# Altium PCB SDC.PcbDoc (part 2 of 2)
Units mm, origin at the board's own origin, x right, y up, seen from the top; angles counter-clockwise.
Board outline 130 x 100 mm, 4 copper layers (Top Layer, Ground Plane, Power Plane, Bottom Layer), stack 1.666 mm thick; 140 components, 375 nets, 501 pads, 368 vias.
Unrouted connection lines stored in the file: 16.
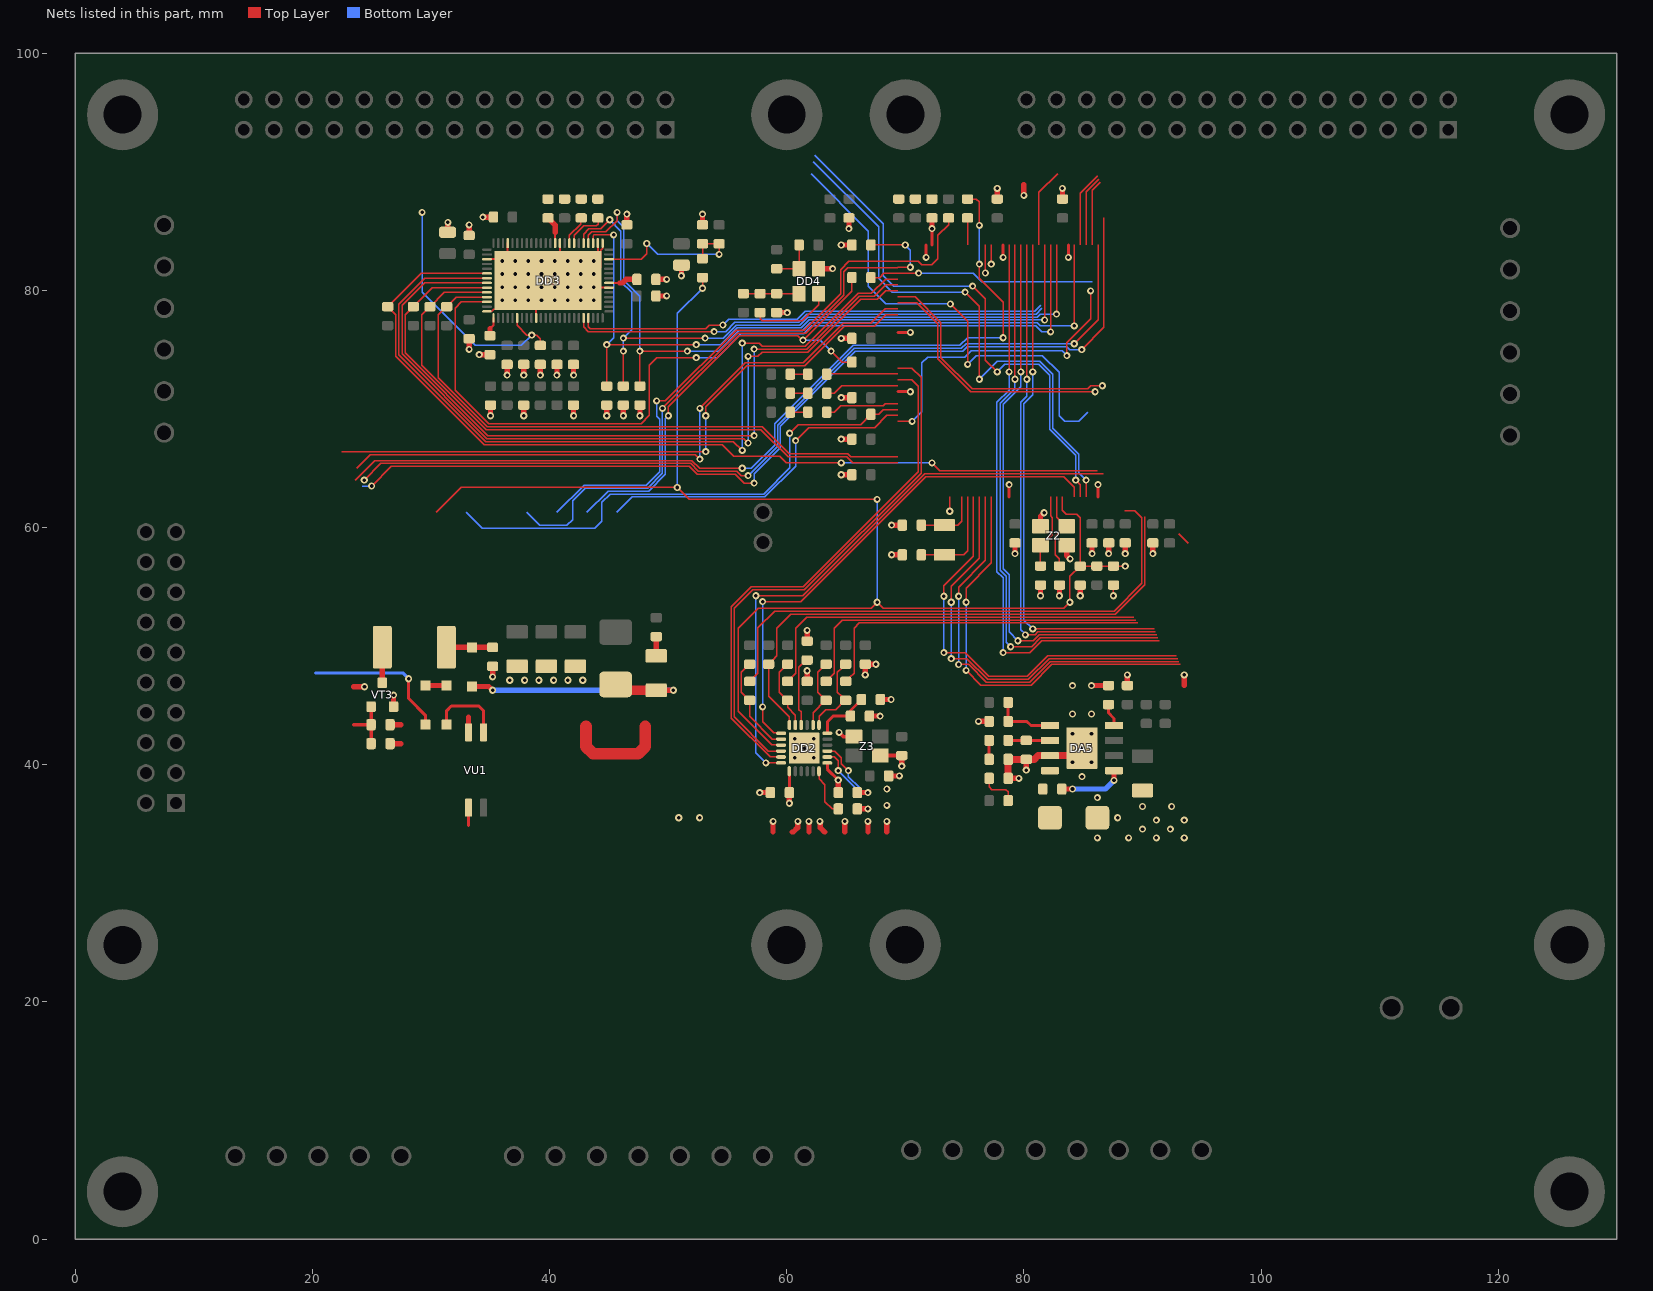
[diagram p4: the nets of this part, all layers, seen from the top]

## Via types
v1: diameter 0.6, hole 0.3, Top Layer to Bottom Layer, tented both sides, 367 vias
v2: diameter 0.6, hole 0.3, Top Layer to Bottom Layer, 1 vias

## Nets (pads, with @x,y where several pads share a name; then routed paths per layer and width w, separated by ;. In a path a pad name is that pad's centre, name@x,y a point inside that pad or via, vN(x,y) a via of type N, cw(c..) or ccw(c..) an arc to the next point about the centre after c; other vN are vias at no path point) (continued)
GND: C1.1 C4.1 C5.2 C6.2 C7.2 C8.2 C9.1 C10.1 C15.1 C16.1 C17.1 C18.1 C19.1 C20.1 C21.1 C22.1 C23.1 C24.1 C25.1 C26.1 C28.1 C29.1 C30.1 C34.2 C35.2 C36.1 C37.1 C38.1 C39.1 C40.1 C41.1 C42.1 C43.1 C44.1 C45.1 C46.1 C47.1 C48.1 C49.1 C50.1 C51.2 C52.1 C53.1 C54.1 C146.1 C148.1 C149.1 C154.1 C162.1 C163.1 C164.1 C167.2 C175.1 DA5.7 DA5.9 DD2.25 DD3.3 DD3.14 DD3.24 DD3.44 DD3.53 DD3.54 DD3.62 DD3.73 DD3.77 DD4.2 R8.2 R12.2 R28.1 R29.1 R35.2 R36.2 R41.1 R45.2 R50.2 R52.2 R53.1 R54.2 R129.1 R141.2 R145.2 R168.2 VD54.2 VT3.2 VU1.2 Z2.2 Z3.2 | length 100.2
  Top Layer w0.125: DD3.14@34.725,78.225 35.143,78.225 35.318,78.4 36.35,78.4 v1(37.125,79.175) ; v1(43.725,81.375) 44.3,81.95 44.3,83.382 44.475,83.557 DD3.53@44.475,83.975
  Top Layer w0.17: DD3.3@34.725,82.625 DD3.77@36.475,82.625 ; DD3.73@36.475,83.975 DD3.77@36.475,82.625 ; v1(37.125,81.375) 36.475,82.025 DD3.77@36.475,82.625 ; v1(38.225,82.475) 38.075,82.625 DD3.77@36.475,82.625 ; DD3.24@38.875,77.675 38.875,78.725 v1(39.325,79.175) ; v1(40.425,82.475) 40.875,82.925 DD3.62@40.875,83.975 ; v1(42.625,79.175) 43.675,80.225 DD3.44@45.025,80.225 ; v1(43.725,82.475) 44.075,82.825 DD3.54@44.075,83.975
  Top Layer w0.25: 69.375,71.45 v1(70.425,71.45) ; 69.375,76.45 v1(70.425,76.45) ; v1(71.75,82.775) 71.75,83.825 ; v1(78.25,82.775) 78.25,83.825 ; 78.75,62.575 v1(78.75,63.625) ; v1(83.75,82.775) 83.75,83.825 ; 86.25,62.575 v1(86.25,63.625)
  Top Layer w0.3: v1(64.425,42.725) 64.775,42.375 Z3.2@65.675,42.375 ; Z3.2@67.875,40.775 C34.2@69.7,40.775
  Top Layer w0.45: 23.5,46.575 v1(24.4,46.575) ; C175.1@26.55,41.775 27.45,41.775 ; R168.2@26.55,43.375 27.45,43.375 ; VT3.2@26.85,44.9 v1(26.85,45.875) ; C49.1@31.425,84.825 v1(31.425,85.725) ; VU1.2@33.165,42.725 33.175,42.735 33.175,44 ; v1(33.225,75.025) C41.1@33.225,75.925 ; C40.1@33.225,84.625 v1(33.225,85.525) ; v1(34.075,74.575) C46.1@34.975,74.575 ; v1(34.375,86.175) C45.1@35.275,86.175 ; v1(35.025,69.425) R41.1@35.025,70.325 ; v1(35.2,47.4) C167.2@35.2,48.3 ; v1(36.425,72.85) C52.1@36.425,73.75 ; v1(37.825,69.425) R53.1@37.825,70.325 ; v1(37.825,72.85) C54.1@37.825,73.75 ; v1(39.225,72.85) C37.1@39.225,73.75 ; v1(40.625,72.85) C38.1@40.625,73.75 ; v1(42.025,69.425) C53.1@42.025,70.325 ; v1(42.025,72.85) C39.1@42.025,73.75 ; v1(44.825,69.425) R50.2@44.825,70.325 ; v1(46.225,69.425) R52.2@46.225,70.325 ; C43.1@46.525,85.525 v1(46.525,86.425) ; v1(47.625,69.425) R54.2@47.625,70.325 ; C42.1@48.975,79.525 v1(49.875,79.525) ; C47.1@48.975,80.925 v1(49.875,80.925) ; v1(51.125,81.225) C50.1@51.125,82.125 ; C36.1@52.9,85.525 v1(52.9,86.425) ; v1(57.725,37.65) C25.1@58.625,37.65 ; C51.2@59.15,78.125 v1(60.05,78.125) ; C28.1@61.725,47.025 v1(61.725,47.925) ; R29.1@61.725,50.425 v1(61.725,51.325) ; 61.875,34.325 v1(61.875,35.225) ; DD4.2@62.7,81.825 v1(63.875,81.825) ; v1(64.6,64.45) C20.1@65.5,64.45 ; v1(64.6,67.45) R12.2@65.5,67.45 ; v1(64.6,70.95) C19.1@65.5,70.95 ; v1(64.6,75.95) C18.1@65.5,75.95 ; v1(64.6,83.825) R8.2@65.5,83.825 ; v1(65.25,85.2) R45.2@65.25,86.1 ; R28.1@65.95,36.275 v1(66.85,36.275) ; C26.1@65.95,37.65 v1(66.85,37.65) ; C29.1@66.975,44.1 v1(67.875,44.1) ; C30.1@67.9,45.5 v1(68.8,45.5) ; C35.2@68.6,39.05 v1(69.5,39.05) ; v1(68.85,57.7) C8.2@69.75,57.7 ; v1(68.85,60.2) C6.2@69.75,60.2 ; v1(69.7,39.875) C34.2@69.7,40.775 ; v1(76.175,43.65) R141.2@77.075,43.65 ; C16.1@77.75,87.7 v1(77.75,88.6) ; R129.1@78.675,38.85 v1(79.575,38.85) ; v1(79.25,57.8) C9.1@79.25,58.7 ; v1(80,88) 80,88.9 ; v1(80.2,39.55) C149.1@80.2,40.45 ; v1(81.4,54.25) C5.2@81.4,55.15 ; Z2.2@81.4,60.1 81.4,60.95 v1(81.7,61.25) ; v1(83,54.25) C7.2@83,55.15 ; C15.1@83.25,87.7 v1(83.25,88.6) ; Z2.2@83.6,58.5 83.6,57.65 v1(83.9,57.35) ; v1(84.75,54.25) C1.1@84.75,55.15 ; v1(85.7,46.675) C154.1@87.125,46.675 ; v1(85.75,57.8) C10.1@85.75,58.7 ; v1(87.15,57.8) C22.1@87.15,58.7 ; v1(88.55,57.8) C23.1@88.55,58.7 ; R145.2@88.725,46.675 v1(88.725,47.575) ; v1(90.875,57.8) C24.1@90.875,58.7 ; 93.525,46.675 v1(93.525,47.575)
  Top Layer w0.6: R129.1@78.675,38.85 C148.1@78.675,40.45 C149.1@80.2,40.45 80.875,40.45 81.19,40.765 DA5.7@82.2,40.765 84.265,40.765 v1(84.9,41.4)
  other v1: 86.2,33.825 88.825,33.825 91.175,33.825 93.525,33.825 90,34.575 92.35,34.575 91.175,35.325 93.525,35.325 87.9,35.525 90,36.475 92.45,36.475 86.2,37.225 84.9,39 84.1,40.2 85.7,40.2 60.675,40.6 62.275,40.6 61.475,41.4 60.675,42.2 62.275,42.2 84.1,42.6 85.7,42.6 84.1,44.275 85.7,44.275 84.1,46.675 36.65,47.125 37.9,47.125 39.1,47.125 40.35,47.125 41.55,47.125 42.8,47.125 36.025,79.175 38.225,79.175 40.425,79.175 41.525,79.175 43.725,79.175 36.025,80.275 37.125,80.275 38.225,80.275 39.325,80.275 40.425,80.275 41.525,80.275 42.625,80.275 43.725,80.275 36.025,81.375 38.225,81.375 39.325,81.375 40.425,81.375 41.525,81.375 42.625,81.375 36.025,82.475 37.125,82.475 39.325,82.475 41.525,82.475 42.625,82.475
GND_IF1: 
GND_IF2: 
GNDP: VU1.3 | length 1.5
  Top Layer w0.25: VU1.3@33.165,36.375 33.175,36.365 33.175,34.875
  other v1: 50.9,35.525 52.65,35.525
GPS_ANT: 
GPS_EINT0:  | length 53.9
  Top Layer w0.125: 22.5,66.4 v1(53.175,66.4) ; v1(53.175,69.425) 53.175,70.175 56.625,73.625 61.504,73.625 64.854,76.975 67.375,76.975 68.35,77.95 69.375,77.95
  Bottom Layer w0.125: v1(53.175,66.4) v1(53.175,69.425)
GPS_GPIO:  | length 54
  Top Layer w0.125: 23.75,65 24.9,66.15 52.3,66.15 v1(52.675,65.775) ; v1(52.675,70.05) 56.5,73.875 61.4,73.875 64.75,77.225 67.1,77.225 68.325,78.45 69.375,78.45
  Bottom Layer w0.125: v1(52.675,65.775) v1(52.675,70.05)
GPS_RX:  | length 75.7
  Top Layer w0.125: v1(24.375,64) 25.775,65.4 51.896,65.4 52.546,64.75 55.8,64.75 56.175,64.375 v1(56.75,64.375) ; v1(84.25,75.5) 86.25,77.5 86.25,83.825
  Bottom Layer w0.125: v1(56.75,64.375) 59.225,66.85 59.225,68.629 65.696,75.1 74.725,75.1 75.125,75.5 v1(84.25,75.5)
GPS_TX:  | length 80.1
  Top Layer w0.125: v1(25,63.5) 26.65,65.15 51.793,65.15 52.443,64.5 55.675,64.5 56.425,63.75 v1(57.25,63.75) ; v1(84.875,75) 86.75,76.875 86.75,83.825 86.75,86.1
  Bottom Layer w0.125: 24.229,63.5 v1(25,63.5) ; v1(57.25,63.75) 57.25,64.521 59.475,66.746 59.475,68.525 65.8,74.85 74.829,74.85 75.229,75.25 83.625,75.25 83.875,75 v1(84.875,75)
HSE_IN: C5.1 Z2.1 | length 6.4
  Top Layer w0.125: C5.1@81.4,56.75 Z2.1@81.4,58.5 81.5,58.5 82.4,59.4 82.4,60.825 82.25,60.975 82.25,62.575
HSE_OUT: C7.1 Z2.3 | length 6.7
  Top Layer w0.125: 82.75,62.575 82.75,60.85 Z2.3@83.5,60.1 ; C7.1@83,56.75 83,57.35 82.65,57.7 82.65,59.25 Z2.3@83.5,60.1 ; Z2.3@83.6,60.1 Z2.3@83.5,60.1
INC_ENC_1_A: DD3.35 | length 39.8
  Top Layer w0.125: DD3.35@43.275,77.675 43.275,76.925 43.425,76.775 53.175,76.775 53.475,77.075 v1(54.625,77.075)
  Bottom Layer w0.125: v1(54.625,77.075) 55.125,77.575 60.9,77.575 61.575,78.25 80.918,78.25 81.418,78.75
INC_ENC_1_A_N: 
INC_ENC_1_A_P: 
INC_ENC_1_B: DD3.34 | length 40.4
  Top Layer w0.125: DD3.34@42.875,77.675 42.875,76.925 43.275,76.525 v1(53.875,76.525)
  Bottom Layer w0.125: v1(53.875,76.525) 54.839,76.525 55.639,77.325 61.004,77.325 61.679,78 81.021,78 81.521,78.5
INC_ENC_1_B_N: 
INC_ENC_1_B_P: 
INC_ENC_2_A: 
INC_ENC_2_A_N: 
INC_ENC_2_A_P: 
INC_ENC_2_B: 
INC_ENC_2_B_N: 
INC_ENC_2_B_P: 
ISO_OUT_1:  | length 35.3
  Top Layer w0.125: v1(73.25,49.45) 75.054,49.45 77.041,47.462 80.28,47.462 82.018,49.2 82.036,49.2 92.862,49.2 ; v1(73.25,54.2) 73.25,55.075 75.75,57.575 75.75,62.575
  Bottom Layer w0.125: v1(73.25,49.45) v1(73.25,54.2)
ISO_OUT_2:  | length 35.1
  Top Layer w0.125: v1(73.875,48.95) 75.2,48.95 76.938,47.212 80.384,47.212 82.121,48.95 82.139,48.95 92.966,48.95 ; v1(73.875,53.7) 73.875,55.05 76.25,57.425 76.25,62.575
  Bottom Layer w0.125: v1(73.875,48.95) v1(73.875,53.7)
ISO_OUT_3:  | length 35
  Top Layer w0.125: v1(74.5,48.45) 75.346,48.45 76.834,46.962 80.505,46.962 82.243,48.7 93.07,48.7 ; v1(74.5,54.2) 74.5,54.975 76.75,57.225 76.75,62.575
  Bottom Layer w0.125: v1(74.5,48.45) v1(74.5,54.2)
ISO_OUT_4:  | length 34.8
  Top Layer w0.125: v1(75.125,47.95) 76.363,46.712 80.609,46.712 82.346,48.45 93.173,48.45 ; v1(75.125,53.7) 75.125,54.9 77.25,57.025 77.25,62.575
  Bottom Layer w0.125: v1(75.125,47.95) v1(75.125,53.7)
LED1: HL1.2 | length 6
  Top Layer w0.125: HL1.2@63.375,72.925 63.4,72.95 69.375,72.95
LED2: HL2.2 | length 6.3
  Top Layer w0.125: HL2.2@63.375,71.325 64.025,71.325 64.65,71.95 69.375,71.95
LED3: HL3.2 | length 6.3
  Top Layer w0.125: HL3.2@63.375,69.725 64.025,69.725 64.575,70.275 68.125,70.275 68.3,70.45 69.375,70.45
LED_G: DD2.2 | length 4.1
  Top Layer w0.125: DD2.2@63.425,40.65 64.025,40.65 64.35,40.325 v1(64.35,39.5)
  Bottom Layer w0.125: v1(64.35,39.5) 65.9,37.95
LED_Y: DD2.3 | length 4.6
  Top Layer w0.125: DD2.3@63.425,41.15 64.05,41.15 64.6,40.6 64.6,40.1 v1(65.2,39.5)
  Bottom Layer w0.125: v1(65.2,39.5) 65.2,39.004 66.15,38.054
LSE_IN: C6.1 Z1.2 | length 5.6
  Top Layer w0.125: C6.1@71.35,60.2 Z1.2@73.3,60.2 74.425,60.2 74.75,60.525 74.75,62.575
LSE_OUT: C8.1 Z1.1 | length 8.6
  Top Layer w0.125: C8.1@71.35,57.7 Z1.1@73.3,57.7 74.925,57.7 75.25,58.025 75.25,62.575
MDC: DD2.13 | length 43.9
  Top Layer w0.125: v1(57.975,44.875) 57.975,43.624 58.916,42.683 59.492,42.683 DD2.13@59.525,42.65 ; v1(57.975,53.75) 61.2,53.75 71.725,64.275 83.35,64.275 83.95,63.675 84.25,63.375 84.25,62.575
  Bottom Layer w0.125: v1(57.975,44.875) v1(57.975,53.75)
MDIO: DD2.12 R20.2 | length 47.5
  Top Layer w0.125: DD2.12@60.225,43.35 60.225,44.025 58.475,45.775 R20.2@58.475,48.475 58.497,48.475 58.827,48.805 58.827,48.827 59.175,49.175 59.175,51.525 60.35,52.7 64.493,52.7 65.789,52.7 85.95,52.7 87.129,52.7 87.704,52.7 90.187,55.184 90.187,55.759 90.187,56.937 90.187,60.916
NetC2_2:  | length 1.2
  Top Layer w0.125: v1(73.75,61.375) 73.75,62.575
NetC3_2: C4.2 | length 2.3
  Top Layer w0.25: 72.25,83.825 v1(72.25,85.2)
  Top Layer w0.45: v1(72.25,85.2) C4.2@72.25,86.1
NetC25_2: C25.2 C26.2 DD2.1 DD2.19 L2.2 | length 13.1
  Top Layer w0.25: C25.2@60.225,37.65 DD2.19@60.225,39.45 ; DD2.1@63.425,40.15 63.425,39.625 v1(64.35,38.7)
  Top Layer w0.45: 58.85,34.325 v1(58.85,35.225) ; v1(60.225,36.75) C25.2@60.225,37.65 ; 60.475,34.325 60.55,34.325 60.921,34.696 60.921,35.196 v1(60.95,35.225) ; v1@62.829,35.196 62.829,34.696 63.2,34.325 ; C26.2@64.35,37.65 v1(64.35,38.7) ; 64.9,34.325 v1(64.9,35.225) ; v1(66.625,47.575) L2.2@66.625,48.475 v1(67.525,48.475) ; 66.85,34.325 v1(66.85,35.225) ; 68.45,34.325 v1(68.45,35.225)
  other v1: 62.8,35.225 68.45,36.575 68.45,37.95
NetC29_2: C29.2 C30.2 DD2.6 | length 4.9
  Top Layer w0.25: DD2.6@63.425,42.65 63.425,43.6 63.925,44.1 C29.2@65.375,44.1 65.375,44.575 C30.2@66.3,45.5
NetC36_2: C36.2 DD3.50 R37.1 R38.1 | length 14.3
  Top Layer w0.125: DD3.50@45.025,82.625 47.725,82.625 48.2,83.1 v1(48.2,83.95) ; R38.1@52.9,82.675 C36.2@52.9,83.925 R37.1@54.3,83.925 v1(54.3,83.025)
  Bottom Layer w0.125: v1(48.2,83.95) 49.125,83.025 v1(54.3,83.025)
NetC46_2: C46.2 DD3.15 | length 1.6
  Top Layer w0.17: 34.975,76.75 35.275,77.05 DD3.15@35.275,77.675
  Top Layer w0.45: C46.2@34.975,76.175 34.975,76.75
NetC47_2: C47.2 DD3.45 | length 2.5
  Top Layer w0.17: DD3.45@45.025,80.625 45.925,80.625
  Top Layer w0.45: 45.925,80.625 46.15,80.625 46.45,80.925 C47.2@47.375,80.925
NetC48_2: C48.2 DD3.63 | length 2.4
  Top Layer w0.17: C48.2@39.875,86.1 C48.2@39.95,86.1 ; DD3.63@40.475,83.975 40.475,84.875
  Top Layer w0.45: C48.2@39.875,86.1 40.475,85.5 40.475,84.875
NetC51_1: C51.1 DD4.4 L3.1 R40.1 | length 4.7
  Top Layer w0.125: L3.1@56.35,79.725 R40.1@57.75,79.725 C51.1@59.15,79.725 DD4.4@61.05,79.725
NetC55_2: 
NetC65_2: 
NetC66_2: 
NetC67_2: 
NetC98_2: 
NetC106_2: 
NetC116_2: 
NetC118_1: 
NetC119_2: 
NetC122_2: 
NetC124_1: 
NetC124_2: 
NetC126_2: 
NetC131_1: 
NetC131_2: 
NetC132_1: 
NetC132_2: 
NetC135_2: 
NetC136_2: 
NetC142_2: 
NetC143_2: 
NetC144_1: C144.1 DA5.8 VD54.1
NetC144_2: C144.2 DA5.1 | length 5.5
  Top Layer w0.45: C144.2@83.2,37.95 v1(84.1,37.95) ; v1(87.6,38.675) DA5.1@87.6,39.495
  Bottom Layer w0.45: v1(84.1,37.95) 86.875,37.95 v1(87.6,38.675)
NetC148_2: C148.2 R138.2 | length 1.6
  Top Layer w0.25: C148.2@77.075,40.45 R138.2@77.075,42.05
NetC149_2: C149.2 DA5.6 R138.1 | length 3.5
  Top Layer w0.25: R138.1@78.675,42.05 C149.2@80.2,42.05 80.207,42.043 82.192,42.043 DA5.6@82.2,42.035
NetC154_2: C154.2 DA5.4 | length 2
  Top Layer w0.25: C154.2@87.125,45.075 87.125,44.375 87.6,43.9 DA5.4@87.6,43.305
NetC155_1: 
NetC156_1: 
NetC165_1: C165.1 R156.1 | length 1.6
  Top Layer w0.45: R156.1@49,49.175 C165.1@49,50.8
NetC167_1: C167.1 R162.2 VD58.1 | length 3.9
  Top Layer w0.45: R162.2@31.3,49.9 VD58.1@33.475,49.9 C167.1@35.2,49.9
NetC169_2: 
NetC172_2: 
NetC173_1: 
NetC174_1: 
NetC175_2: C175.2 R168.1 VT3.1 | length 4.6
  Top Layer w0.3: 23.5,43.375 R168.1@24.95,43.375 ; C175.2@24.95,41.775 R168.1@24.95,43.375 ; VT3.1@24.95,44.9 R168.1@24.95,43.375
NetC177_2: 
NetC178_1: 
NetC178_2: 
NetDA2_10: 
NetDA2_12: 
NetDA2_19: 
NetDA3_5: 
NetDA4_3: 
NetDA4_5: 
NetDA4_8: 
NetDA4_10: 
NetDA5_5: DA5.5 R139.2 R141.1 | length 5.3
  Top Layer w0.25: R139.2@78.675,45.25 R141.1@78.675,43.65 80.25,43.65 80.595,43.305 DA5.5@82.2,43.305
NetDA6_4: 
NetDA6_5: 
NetDA6_10: 
NetDA6_15: 
NetDA6_16: 
NetDA6_20: 
NetDD2_7: DD2.7 R18.2 R26.1 | length 7.2
  Top Layer w0.125: DD2.7@62.725,43.35 62.725,44.075 63.3,44.65 64.125,44.65 64.9,45.425 R26.1@64.953,45.425 ; R26.1@64.975,45.425 R26.1@64.953,45.425 ; R18.2@64.975,48.475 64.953,48.475 64.623,48.145 64.623,48.123 64.275,47.775 64.275,46.125 64.623,45.777 64.623,45.755 R26.1@64.953,45.425
NetDD2_8: DD2.8 R17.2 R25.1 | length 6.2
  Top Layer w0.125: DD2.8@62.225,43.35 62.225,44.4 63.25,45.425 R25.1@63.303,45.425 ; R25.1@63.325,45.425 R25.1@63.303,45.425 ; R17.2@63.325,48.475 63.303,48.475 62.973,48.145 62.973,48.123 62.625,47.775 62.625,46.125 62.973,45.777 62.973,45.755 R25.1@63.303,45.425
NetDD2_10: DD2.10 R29.2 | length 5.9
  Top Layer w0.125: DD2.10@61.225,43.35 61.225,44.45 61.025,44.65 61.025,48.2 61.65,48.825 R29.2@61.725,48.825
NetDD2_11: DD2.11 R19.2 R27.1 | length 6.1
  Top Layer w0.125: R27.1@60,45.425 R27.1@60.053,45.425 ; R19.2@60.075,48.475 60.053,48.475 59.723,48.145 59.723,48.123 59.375,47.775 59.375,46.125 59.723,45.777 59.723,45.755 R27.1@60.053,45.425 ; DD2.11@60.725,43.35 60.725,44.175 60.075,44.825 R27.1@60.075,45.425 R27.1@60.053,45.425
NetDD2_14: DD2.14 R33.1 R34.2 | length 8.4
  Top Layer w0.125: R33.1@56.853,45.425 56.523,45.755 56.523,45.777 56.175,46.125 56.175,47.775 56.523,48.123 56.523,48.145 56.853,48.475 R34.2@56.875,48.475 ; R33.1@56.875,45.425 56.875,44.075 58.8,42.15 DD2.14@59.525,42.15
NetDD2_24: DD2.24 R28.2 | length 4.2
  Top Layer w0.125: DD2.24@62.725,39.45 62.725,38.825 63.225,38.325 63.225,36.875 63.825,36.275 R28.2@64.35,36.275
NetDD3_59: DD3.59 R35.1 | length 3.6
  Top Layer w0.125: DD3.59@42.075,83.975 42.075,84.625 42.875,85.425 43.95,85.425 44.1,85.575 44.1,86.075 R35.1@44.075,86.1
NetDD3_60: DD3.60 R36.1 | length 2.5
  Top Layer w0.125: DD3.60@41.675,83.975 41.675,84.625 42.636,85.586 42.636,86.061 R36.1@42.675,86.1
NetDD4_1: DD4.1 R40.2 | length 7
  Top Layer w0.125: R40.2@57.75,78.125 57.75,77.6 57.925,77.425 61.325,77.425 62.7,78.8 DD4.1@62.7,79.725
NetDD4_3: DD4.3 R44.2 R47.2 | length 3.9
  Top Layer w0.125: R47.2@59.15,81.825 DD4.3@61.05,81.825 R44.2@61.05,83.825
NetDD5_59: 
NetDD5_60: 
NetDD6_2: 
NetDD6_6: 
NetDD6_7: 
NetDD7_7: 
NetDD7_8: 
NetDD8_2: 
NetDD8_6: 
NetDD8_7: 
NetDD9_1: 
NetDD9_3: 
NetDD9_4: 
NetDD9_6: 
NetDD10_7: 
NetDD10_8: 
NetDD11_2: 
NetDD11_7: 
NetDD11_8: 
NetDD12_1: 
NetDD12_4: 
NetDD12_6: 
NetDD13_7: 
NetDD13_8: 
NetDD14_2: 
NetDD14_7: 
NetDD14_8: 
NetDD15_1: 
NetDD15_4: 
NetDD15_6: 
NetDD16_7: 
NetDD16_8: 
NetDD17_11: 
NetDD17_12: 
NetDD17_13: 
NetDD17_14: 
NetDD18_11: 
NetDD18_12: 
NetDD18_13: 
NetDD18_14: 
NetDD19_6: 
NetDD19_7: 
NetFU1_2: 
NetFU2_2: 
NetFU3_2: 
NetFU4_2: 
NetFU5_2: 
NetHL1_1: HL1.1 R1.2 | length 1.5
  Top Layer w0.125: R1.2@60.3,72.925 HL1.1@61.775,72.925
NetHL2_1: HL2.1 R2.2 | length 1.5
  Top Layer w0.125: R2.2@60.3,71.325 HL2.1@61.775,71.325
NetHL3_1: HL3.1 R3.2 | length 1.5
  Top Layer w0.125: R3.2@60.3,69.725 HL3.1@61.775,69.725
NetHL4_1: HL4.1 R129.2 | length 3.2
  Top Layer w0.125: R129.2@77.075,38.85 77.075,38.125 77.3,37.9 78.475,37.9 78.675,37.7 HL4.1@78.675,36.975
NetHL5_1: 
NetL7_2: 
NetMH1_1: 
NetMH3_1: 
NetMH4_1: 
NetMH5_1: 
NetR30_2: 
NetR32_2: 
NetR107_1: 
NetR114_1: 
NetR155_2: 
NetR156_2: R156.2 VD57.2 VD58.2 | length 22.2
  Top Layer w0.45: VD58.2@33.475,46.6 34.875,46.6 v1(35.2,46.275) ; VD57.2@45.575,46.765 VD57.2@46.065,46.275 ; R156.2@49,46.275 v1(50.45,46.275)
  Top Layer w0.8: VD57.2@46.065,46.275 R156.2@49,46.275
  Bottom Layer w0.45: v1(35.2,46.275) v1(50.45,46.275)
NetR162_1: R162.1 VT3.3 | length 3
  Top Layer w0.45: VT3.3@25.9,46.9 R162.1@25.9,49.9
NetR173_1: VD63.1 | length 12.5
  Top Layer w0.25: v1(28.125,47.25) 28.125,45.575 29.525,44.175 VD63.1@29.525,43.375
  Bottom Layer w0.25: 20.25,47.75 27.625,47.75 v1(28.125,47.25)
NetTV1_8:  | length 8.9
  Top Layer w1: 43.075,43.225 43.075,41.525 43.675,40.925 47.475,40.925 48.075,41.525 48.075,43.225
NetVD51_2: 
NetVD63_2: VD63.2 VD65.1 | length 1.8
  Top Layer w0.45: VD63.2@29.525,46.675 VD65.1@31.325,46.675
NetVD65_2: VD65.2 VU1.1 | length 6.4
  Top Layer w0.25: VD65.2@31.325,43.375 31.325,44.555 31.72,44.95 34.04,44.95 34.435,44.555 VU1.1@34.435,42.725
OUT_1: 
OUT_1_cn: 
OUT_2: 
OUT_2_cn: 
OUT_3: 
OUT_3_cn: 
OUT_4: 
OUT_4_cn: 
OUT_FLG_0: 
OUT_FLG_0_CN: 
OUT_FLG_1: 
OUT_FLG_1_CN: 
OUT_FLG_2:  | length 43.2
  Top Layer w0.125: v1(80.75,51.45) 90.991,51.45 ; v1(80.75,73.125) 80.75,83.825
  Bottom Layer w0.125: v1(80.75,51.45) 80,52.2 80,70.425 80.75,71.175 v1(80.75,73.125)
OUT_FLG_2_CN: 
OUT_FLG_3:  | length 44.3
  Top Layer w0.125: v1(80.125,50.95) 80.939,50.95 81.189,51.2 81.207,51.2 91.094,51.2 ; v1(80.25,72.5) 80.25,83.825
  Bottom Layer w0.125: v1(80.125,50.95) 80.125,51.025 79.75,51.4 79.75,70.55 80.25,71.05 v1(80.25,72.5)
OUT_FLG_3_CN: 
OUT_FLG_4:  | length 46.4
  Top Layer w0.125: v1(79.5,50.45) 80.793,50.45 81.293,50.95 81.311,50.95 91.198,50.95 ; v1(79.75,73.125) 79.75,83.825
  Bottom Layer w0.125: v1(79.5,50.45) 78.75,51.2 78.75,56.025 78.262,56.513 78.262,70.38 79.75,71.868 v1(79.75,73.125)
OUT_FLG_4_CN: 
OUT_FLG_5:  | length 47.5
  Top Layer w0.125: v1(78.875,49.95) 80.647,49.95 81.397,50.7 81.414,50.7 91.302,50.7 ; v1(79.25,72.5) 79.25,83.825
  Bottom Layer w0.125: v1(78.875,49.95) 78.5,50.325 78.5,55.9 78.012,56.388 78.012,70.484 79.25,71.721 v1(79.25,72.5)
OUT_FLG_5_CN: 
OUT_FLG_6:  | length 48.6
  Top Layer w0.125: v1(78.25,49.45) 80.5,49.45 81.5,50.45 81.518,50.45 91.405,50.45 ; v1(78.75,73.125) 78.75,83.825
  Bottom Layer w0.125: v1(78.25,49.45) 78.25,55.75 77.725,56.275 77.725,70.55 78.75,71.575 v1(78.75,73.125)
OUT_FLG_6_CN: 
PGD_3.3V: R131.1 | length 0.9
  Top Layer w0.125: v1(87.55,54.25) R131.1@87.55,55.15
POE_V1+: 
POE_V1-: 
POE_V2+: 
POE_V2-: 
POE_VCC: 
POE_VDD: 
POE_VPD: 
POE_VSS: 
RMII_CRS_DV: R27.2 | length 33.7
  Top Layer w0.125: R27.2@60.075,47.025 60.097,47.025 60.427,47.355 60.427,47.377 60.775,47.725 60.775,51.525 61.7,52.45 64.596,52.45 65.893,52.45 88.764,52.45 89.275,52.45
RMII_REFCLK: R33.2 | length 45.9
  Top Layer w0.125: R33.2@56.875,47.025 56.897,47.025 57.227,47.355 57.227,47.377 57.575,47.725 57.575,51.55 58.975,52.95 64.389,52.95 65.686,52.95 87.6,52.95 89.937,55.287 89.937,60.813 89.352,61.398 88.502,61.398
RMII_RXD0: R25.2 | length 30.5
  Top Layer w0.125: R25.2@63.325,47.025 63.347,47.025 63.677,47.355 63.677,47.377 64.025,47.725 64.025,51.525 64.7,52.2 65.996,52.2 88.868,52.2 89.425,52.2
RMII_RXD1: R26.2 | length 28.9
  Top Layer w0.125: R26.2@64.975,47.025 64.997,47.025 65.327,47.355 65.327,47.377 65.675,47.725 65.675,51.525 66.1,51.95 88.971,51.95 89.6,51.95
RMII_TXD0: DD2.17 | length 44.5
  Top Layer w0.125: DD2.17@59.525,40.65 58.596,40.65 55.325,43.921 55.325,53.3 57.025,55 61.375,55 71.075,64.7 71.075,71.9 70.525,72.45 69.375,72.45
RMII_TXD1: DD2.18 | length 49.3
  Top Layer w0.125: v1(57.4,54.25) 61.346,54.25 71.621,64.525 86.675,64.525 ; v1(58.25,40.15) DD2.18@59.525,40.15
  Bottom Layer w0.125: v1(57.4,54.25) 57.4,41 v1(58.25,40.15)
RMII_TXEN: DD2.16 | length 45.1
  Top Layer w0.125: DD2.16@59.525,41.15 58.45,41.15 55.575,44.025 55.575,53.175 57.15,54.75 61.479,54.75 71.325,64.596 71.325,72.675 70.564,73.436 69.389,73.436 69.375,73.45
RSNS: 
RST: C1.2 DD2.15 R4.2 R38.2 R131.2 | length 121
  Top Layer w0.125: 30.45,61.27 32.555,63.375 v1(50.775,63.375) 51.775,62.375 v1(67.625,62.375) ; v1(52.9,80.175) R38.2@52.9,81.075 ; DD2.15@59.525,41.65 59.501,41.674 58.751,41.674 55.925,44.5 55.925,51.525 57.6,53.2 67.125,53.2 v1(67.625,53.7) 68.125,53.2 83.375,53.2 v1(83.875,53.7) 83.875,55.875 C1.2@84.75,56.75 ; 83.25,62.575 83.25,61.45 83.575,61.125 84.45,61.125 84.75,60.825 C1.2@84.75,56.75 ; v1(88.55,56.75) R131.2@87.55,56.75 R4.2@86.15,56.75 C1.2@84.75,56.75
  Bottom Layer w0.125: v1(50.775,63.375) 50.775,78.05 v1(52.9,80.175) ; v1(67.625,53.7) v1(67.625,62.375)
STATUS_A: DD3.12 | length 74.6
  Top Layer w0.125: DD3.12@34.725,79.025 32.575,79.025 32.05,78.5 32.05,71.571 34.871,68.75 47.725,68.75 48.425,69.45 48.425,73.7 49.05,74.325 v1(52.375,74.325) ; v1(82.25,76.5) 82.25,83.825
  Bottom Layer w0.125: v1(52.375,74.325) 54.125,74.325 56.125,76.325 61.418,76.325 62.093,77 81,77 81.5,76.5 v1(82.25,76.5)
STATUS_B:  | length 5.6
  Top Layer w0.125: 85.75,83.825 85.75,88.425 86.425,89.1
STEP_OUT_1: 
STEP_OUT_1_CN: 
STEP_OUT_2: 
STEP_OUT_2_CN: 
T_MARK: R13.2 | length 74.6
  Top Layer w0.125: 23.6,64 25.25,65.65 52,65.65 52.65,65 v1(56.25,65) ; R13.2@75.25,87.7 76,87.7 76.25,87.45 v1(76.25,85.475) ; v1(76.25,82.211) 76.25,81 78.25,79 v1(78.25,76)
  Bottom Layer w0.125: v1(56.25,65) 57.021,65 58.975,66.954 58.975,68.732 65.593,75.35 74.6,75.35 75.25,76 v1(78.25,76) ; v1(76.25,82.211) v1(76.25,85.475)
T_MARK_T1: R13.1 | length 2.3
  Top Layer w0.125: 75.25,83.825 R13.1@75.25,86.1
T_MARK_T2:  | length 1.1
  Top Layer w0.125: 93.075,59.475 93.523,59.027 93.523,59.005 93.853,58.675 93.875,58.675
T_SENSE_A_1:  | length 44.9
  Top Layer w0.125: v1(75.675,80.35) 76.75,79.275 76.75,74.125 v1(77.75,73.125) ; v1(84.375,64) 84.75,63.625 84.75,62.575
  Bottom Layer w0.125: 62.375,91.375 68.15,85.6 68.15,81.225 69.025,80.35 v1(75.675,80.35) ; v1(77.75,73.125) 78.375,73.75 81.25,73.75 82.175,72.825 82.175,68.275 84.375,66.075 v1(84.375,64)
T_SENSE_A_2:  | length 46.5
  Top Layer w0.125: v1(75.05,79.85) 76.25,78.65 v1(76.25,72.5) ; 85.25,62.575 v1(85.25,64)
  Bottom Layer w0.125: 62.25,90.85 67.75,85.35 67.75,81 68.9,79.85 v1(75.05,79.85) ; v1(76.25,72.5) 77.75,74 81.354,74 82.425,72.929 82.425,68.379 84.625,66.179 84.625,64.625 v1(85.25,64)
T_SENSE_B_1: 
T_SENSE_B_2: 
TCK_SWCLK: R8.1 | length 52.1
  Top Layer w0.125: v1(49.525,70.05) 55.875,76.4 61.604,76.4 64.8,79.596 64.8,81.575 65.15,81.925 69.35,81.925 69.375,81.95 v1(70.425,81.95) ; R8.1@67.1,83.825 v1(70,83.825)
  Bottom Layer w0.125: 38.07,61.27 39.165,60.175 41.45,60.175 41.95,60.675 41.95,62.256 43.019,63.325 48.271,63.325 49.525,64.579 v1(49.525,70.05) ; v1(70,83.825) 70.425,83.4 v1(70.425,81.95)
TDI: R7.2 R9.1 | length 39.7
  Top Layer w0.125: v1(50.025,69.425) 50.025,70.196 55.979,76.15 60.925,76.15 61.325,75.75 v1(61.375,75.8) 65.5,79.925 R9.1@65.5,81.075 ; v1(63.75,74.875) 64.675,73.95 R7.2@65.5,73.95
  Bottom Layer w0.125: 43.15,61.27 44.955,63.075 48.375,63.075 49.775,64.475 49.775,69.175 v1(50.025,69.425) ; v1(61.375,75.8) 62.825,75.8 v1(63.75,74.875)
TDO: R5.2 | length 43.8
  Top Layer w0.125: v1(60.25,67.95) 60.975,68.675 66.225,68.675 R5.2@67.1,69.55 67.75,69.55 68.15,69.95 69.375,69.95
  Bottom Layer w0.125: 32.99,61.27 34.335,59.925 43.825,59.925 44.425,60.525 44.425,62.15 45.1,62.825 58.046,62.825 60.25,65.029 v1(60.25,67.95)
TLMTR_422_A: 
TLMTR_422_B: 
TLMTR_422_RX:  | length 22.3
  Top Layer w0.125: 69.375,79.45 70.829,79.45 73,77.279 73,74.325 75.625,71.7 85.375,71.7 85.625,71.95 v1(86.625,71.95)
TLMTR_422_TX:  | length 21.5
  Top Layer w0.125: 69.375,78.95 70.975,78.95 72.75,77.175 72.75,74.221 75.521,71.45 v1(86,71.45)
TLMTR_422_Y: 
TLMTR_422_Z: 
TMC_A_CS: DD3.6 R43.1 | length 77.1
  Top Layer w0.125: DD3.6@34.725,81.425 29.172,81.425 26.372,78.625 27.05,77.947 27.05,74.45 34.5,67 54.55,67 55.55,66 59.4,66 59.95,65.45 v1(64.6,65.45) ; v1(72.25,65.45) 72.925,64.775 86.175,64.775
  Bottom Layer w0.125: v1(64.6,65.45) v1(72.25,65.45)
TMC_A_DIR: DD3.56 R54.1 | length 64.3
  Top Layer w0.125: DD3.56@43.275,83.975 43.275,84.625 43.575,84.925 44.739,84.925 45.7,85.886 v1(45.7,86.575) ; R54.1@47.625,71.925 v1(47.625,74.875) v1(51.625,74.875) ; v1(84.25,77) 84.25,83.825
  Bottom Layer w0.125: v1(45.7,86.575) 45.7,85.875 46.275,85.3 46.275,80.85 47.625,79.5 v1(47.625,74.875) ; v1(51.625,74.875) 54.25,74.875 55.95,76.575 61.314,76.575 61.989,77.25 81.125,77.25 81.375,77 v1(84.25,77)
TMC_A_EN: DD3.55 R50.1 | length 59.5
  Top Layer w0.125: DD3.55@43.675,83.975 43.675,84.6 43.75,84.675 v1(45.4,84.675) ; R50.1@44.825,71.925 v1(44.825,75.425) v1(52.375,75.425) ; v1(81.75,77.5) 81.75,83.825
  Bottom Layer w0.125: v1(44.825,75.425) 45.4,76 v1(45.4,84.675) ; v1(52.375,75.425) 54.446,75.425 55.846,76.825 61.211,76.825 61.886,77.5 v1(81.75,77.5)
TMC_A_MISO: DD3.9 R46.1 | length 65
  Top Layer w0.125: R46.1@28.503,78.625 27.825,77.947 27.825,74.736 34.811,67.75 v1(57.25,67.75) ; R46.1@28.525,78.625 30.125,80.225 DD3.9@34.725,80.225 ; v1(57.25,75.05) 61.671,75.05 66.121,79.5 67.4,79.5 68.35,80.45 69.375,80.45
  Bottom Layer w0.125: v1(57.25,67.75) v1(57.25,75.05)
TMC_A_MOSI: DD3.8 | length 66.5
  Top Layer w0.125: DD3.8@34.725,80.625 29.475,80.625 27.575,78.725 27.575,74.632 34.707,67.5 56.375,67.5 v1(56.75,67.125) ; v1(56.75,74.425) 57.575,74.425 57.95,74.8 61.775,74.8 66.225,79.25 67.65,79.25 68.35,79.95 69.375,79.95
  Bottom Layer w0.125: v1(56.75,67.125) v1(56.75,74.425)
TMC_A_RX: DD3.11 R49.1 | length 51.5
  Top Layer w0.125: DD3.11@34.725,79.425 32.125,79.425 R49.1@31.325,78.625 31.303,78.625 30.625,77.947 30.625,72.643 34.768,68.5 57.929,68.5 60.229,66.2 65.154,66.2 65.404,65.95 69.375,65.95
TMC_A_SCK: DD3.7 | length 69.5
  Top Layer w0.125: DD3.7@34.725,81.025 29.5,81.025 27.3,78.825 27.3,78.051 27.3,74.554 34.604,67.25 55.5,67.25 v1(56.25,66.5) ; v1(56.25,75.55) 57.687,75.55 57.937,75.3 61.568,75.3 66.018,79.75 67.15,79.75 68.35,80.95 69.375,80.95
  Bottom Layer w0.125: v1(56.25,66.5) v1(56.25,75.55)
TMC_A_STEP: DD3.57 R52.1 | length 61.9
  Top Layer w0.125: DD3.57@42.875,83.975 42.875,84.725 43.325,85.175 44.3,85.175 v1(45.075,85.95) ; R52.1@46.225,71.925 v1(46.225,74.875) ; v1(46.225,75.975) v1(53.125,75.975) ; v1@82.75,77.875 82.75,83.825
  Bottom Layer w0.125: v1(45.075,85.95) 46.025,85 46.025,80.725 46.925,79.825 46.925,76.675 v1(46.225,75.975) v1(46.225,74.875) ; v1(53.125,75.975) 54.643,75.975 55.743,77.075 61.107,77.075 61.782,77.75 81.125,77.75 81.375,78 v1(82.75,78)
TMC_A_TX: DD3.10 R48.1 | length 54.1
  Top Layer w0.125: R48.1@29.903,78.625 29.225,77.947 29.225,73.689 34.664,68.25 57.825,68.25 60.125,65.95 65.05,65.95 65.55,65.45 69.375,65.45 ; R48.1@29.925,78.625 31.125,79.825 DD3.10@34.725,79.825
TMC_B_CS: R9.2 | length 19.2
  Top Layer w0.125: R9.2@67.1,81.075 67.825,81.075 68.2,81.45 69.375,81.45 ; 69.35,81.425 69.375,81.45 ; v1(71.125,81.45) 69.375,81.45
  Bottom Layer w0.125: v1(71.125,81.45) 75.725,81.45 76.464,80.711 85.371,80.711 85.373,80.713 85.777,80.713 85.779,80.711
TMC_B_DIR:  | length 6.4
  Top Layer w0.125: 84.75,83.825 84.75,88.175 86.175,89.6 86.218,89.6
TMC_B_EN:  | length 6.7
  Top Layer w0.125: 81.25,83.825 81.25,88.25 82.85,89.85
TMC_B_MISO: 
TMC_B_MOSI:  | length 25.6
  Top Layer w0.125: 69.375,68.95 v1(70.575,68.95) ; v1(83.625,74.5) 83.625,75.6 85.625,77.6 v1(85.625,79.95)
  Bottom Layer w0.125: v1(70.575,68.95) 71.4,69.775 71.4,73.875 71.9,74.375 75.025,74.375 75.55,74.9 83.225,74.9 v1(83.625,74.5)
TMC_B_RX:  | length 2.4
  Top Layer w0.125: v1(76.75,81.461) 76.75,83.825
TMC_B_SCK: 
TMC_B_STEP:  | length 6
  Top Layer w0.125: 85.25,83.825 85.25,88.3 86.3,89.35 86.321,89.35
TMC_B_TX:  | length 1.6
  Top Layer w0.125: v1(77.25,82.211) 77.25,83.825
  Bottom Layer w0.125: v1@77.25,82.2 v1@77.261,82.211
TMS_SWDIO: R6.2 | length 50.1
  Top Layer w0.125: v1(49.025,70.675) 49.775,70.675 55.75,76.65 61.5,76.65 64.55,79.7 64.55,81.75 65.25,82.45 71.1,82.45 71.375,82.175 72.25,82.175 72.75,82.675 72.75,83.825 72.75,84.625 73.65,85.525 R6.2@73.65,86.1
  Bottom Layer w0.125: 40.61,61.27 42.915,63.575 48.168,63.575 49.275,64.682 49.275,69.15 49.025,69.4 v1(49.025,70.675)
TRST:  | length 28.3
  Top Layer w0.125: v1(60.75,67.325) 61.85,68.425 67.425,68.425 68.45,69.45 69.375,69.45
  Bottom Layer w0.125: 45.69,61.27 46.995,62.575 58.15,62.575 60.75,65.175 v1(60.75,67.325)
V_RLY: 
VM_A_DIV: C37.2 DD3.20 | length 61.8
  Top Layer w0.125: DD3.20@37.275,77.675 37.275,77.036 38.086,76.225 v1(38.5,76.225) 38.925,76.225 39.225,75.925 C37.2@39.225,75.35 ; v1(73.8,78.85) 75.25,77.4 v1(75.25,73.75)
  Bottom Layer w0.125: v1(29.25,86.575) 29.25,79.825 33.725,75.35 37.625,75.35 v1(38.5,76.225) ; 62.05,89.825 66.875,85 66.875,80.325 68.35,78.85 v1(73.8,78.85) ; v1(75.25,73.75) 76,74.5 81.561,74.5 82.975,73.086 82.975,69.425 83.45,68.95 84.646,68.95 85.396,69.7
VM_B_DIV: 
pads on no net: +24V.1 +24V.2 az_abs.1 az_abs.2 az_abs.3 az_abs.4 az_abs.5 az_abs.6 az_abs.7 az_abs.8 az_inc.1 az_inc.2 az_inc.3 az_inc.4 az_inc.5 az_inc.6 azimuth.1 azimuth.2 azimuth.3 azimuth.4 azimuth.5 azimuth.6 azimuth.7 azimuth.8 azimuth.9 azimuth.10 azimuth.11 azimuth.12 azimuth.13 azimuth.14 azimuth.15 azimuth.16 azimuth.17 azimuth.18 azimuth.19 azimuth.20 azimuth.21 azimuth.22 azimuth.23 azimuth.24 azimuth.25 azimuth.26 azimuth.27 azimuth.28 azimuth.29 azimuth.30 DD3.1 DD3.4 DD3.5 DD3.21 DD3.22 DD3.25 DD3.26 DD3.27 DD3.28 DD3.29 DD3.30 DD3.33 DD3.36 DD3.37 DD3.38 DD3.58 DD3.64 DD3.65 DD3.66 DD3.67 DD3.68 DD3.69 DD3.70 DD3.71 DD3.74 DD3.75 DD3.76 Designator9.1 Designator9.2 Designator9.3 Designator9.4 Designator9.5 Designator9.6 Designator9.7 Designator9.8 Designator9.9 Designator9.10 Designator9.11 Designator9.12 Designator9.13 Designator9.14 Designator9.15 Designator9.16 Designator9.17 Designator9.18 Designator9.19 Designator9.20 el_abs.1 el_abs.2 el_abs.3 el_abs.4 el_abs.5 el_abs.6 el_abs.7 el_abs.8 el_inc.1 el_inc.2 el_inc.3 el_inc.4 el_inc.5 el_inc.6 elevation.1 elevation.2 elevation.3 elevation.4 elevation.5 elevation.6 elevation.7 elevation.8 elevation.9 elevation.10 elevation.11 elevation.12 elevation.13 elevation.14 elevation.15 elevation.16 elevation.17 elevation.18 elevation.19 elevation.20 elevation.21 elevation.22 elevation.23 elevation.24 elevation.25 elevation.26 elevation.27 elevation.28 elevation.29 elevation.30 RS-422.1 RS-422.2 RS-422.3 RS-422.4 RS-422.5

## Polygon pours and split planes (outlines as drawn)
GND on Top Layer "GND_L01_P108" (solid, remove dead copper, pour order 108): 36.4,45.6 36.15,45.85 36.15,49.125 36.4,49.375 42.925,49.375 43.175,49.125 43.175,46.175 42.625,45.625 41.825,44.825 41.825,42.125 41.575,41.875 39.575,41.875 39.325,42.125 39.325,44.8 38.525,45.6
NetR156_2 on Top Layer "NETR156_2_L01_P107" (solid, remove dead copper, pour order 107): 44.325,44.8 43.525,45.6 43.525,48.175 43.775,48.425 47.375,48.425 47.625,48.175 47.625,45.625 46.825,44.825 46.825,42.125 46.575,41.875 44.575,41.875 44.325,42.125
+24_FUSE on Top Layer "+24_FUSE_L01_P104" (solid, remove dead copper, pour order 104): 4.75,49.2 4.5,49.45 4.5,53.625 4.75,53.875 47.375,53.875 47.625,53.625 47.625,49.775 47.375,49.525 43.775,49.525 43.175,50.125 36.4,50.125 36.15,50.375 36.15,52.125 35.9,52.375 23.325,52.375 22.2,51.25 8.75,51.25 7.9,50.4 5.825,50.4 5.675,50.25 5.675,49.2
+24_FUSE on Bottom Layer "+24_FUSE_L04_P112" (solid, remove dead copper, pour order 112): 4.5,51.175 4.5,53.625 4.75,53.875 47.375,53.875 47.625,53.625 47.625,51.175 47.375,50.925 21.875,50.925 4.75,50.925
NetC25_2 on Bottom Layer "NETC25_2_L04_P109" (solid, remove dead copper, pour order 109): 65.925,47.15 66.375,46.7 66.375,34.725 66.625,34.475 68.95,34.475 69.2,34.725 69.2,49 68.95,49.25 66.175,49.25 65.925,49
+5_REF_A on Power Plane (split plane): 43.698,71.377 39.875,71.377 39.826,71.368 39.785,71.34 39.757,71.299 39.748,71.25 39.748,68.877 35.877,68.877 35.877,69.998 38.575,69.998 38.624,70.007 38.665,70.035 38.693,70.076 38.702,70.125 38.702,72.498 43.698,72.498
POE_VPD on Power Plane (split plane): 129.598,0.402 0.402,0.402 0.402,99.598 129.598,99.598
GND on Ground Plane (split plane): 129.598,0.402 0.402,0.402 0.402,99.598 129.598,99.598

## Other copper
Bottom Layer:
  rectangle net GND: 83.8,39.9 86,42.9
  rectangle net GND: 60.375,40.3 62.575,42.5
  rectangle net GND: 35.725,78.875 44.025,82.775
  pour cut-out: 83.2,37.475 83.45,37.225 88.125,37.225 88.375,37.475 88.375,43.725 88.125,43.975 83.45,43.975 83.2,43.725
Ground Plane (plane layer: these items are gaps in the copper):
  lines w0.35: 32.55,37.375 52,37.375 53.575,35.8 ; 32.55,41.375 54.275,41.375 56.875,38.775
Power Plane (plane layer: these items are gaps in the copper):
  lines w0.2: 73.25,55.05 73.25,61.95 74.25,61.95 74.25,56.05
  lines w0.25: 57.125,68.75 57.125,72.625 43.825,72.625 ; 65.65,43.875 65.65,50.2 ; 69.556,64 69.556,65.45 39.875,65.45 39.875,68.75 ; 71.55,80 71.55,85.7 72.975,85.7 ; 72.95,89.225 74.425,89.225 74.425,86.1 86.05,86.1 86.05,89.225 ; 72.975,82.2 72.975,85.7 ; 88.9,59.75 91.5,59.75 ; 39.875,68.75 35.75,68.75 35.75,70.125 38.575,70.125 38.575,72.625 43.825,72.625 ; 39.875,68.75 39.875,71.25 43.825,71.25 43.825,72.625 ; 72.975,85.7 72.975,85.7
  lines w0.35: 13.525,54.325 56.225,54.325 56.225,43.875 65.65,43.875 ; 13.525,87.275 57.1,87.275 ; 55.325,40.2 56.025,39.5 69.2,39.5 ; 69.2,33.525 69.2,39.5 ; 92.35,39.5 69.2,39.5

## Silkscreen, mask and mechanical layers (free items; w line width, h text height)
Top Overlay:
  lines w0.15: 6.825,86.025 29.275,86.025 29.925,86.675 29.925,86.35 ; 24.75,72.625 24.75,71.25 32.55,71.25 34.725,73.425 ; 34.3,73.425 34.725,73.425 ; 34.725,73 34.725,73.425 ; 62.3,68.525 62.5,68.725 ; 62.7,68.525 62.5,68.725 ; 63.275,62.55 63.9,62.55 63.9,66.475 62.5,66.475 62.5,68.725 ; 66.45,46.375 66.225,46.6 ; 66.45,46.825 66.225,46.6 ; 69.05,43.2 69.225,43.375 72.675,43.375 72.675,43.925 ; 69.5,33.95 69.5,33.55 ; 69.9,33.55 69.5,33.55 ; 72.75,47.2 72.75,46.6 66.225,46.6 ; 76.55,34.825 76.55,34.2 70.15,34.2 69.5,33.55 ; 79.975,57.55 80.225,57.55 ; 80.225,57.3 80.225,57.55 ; 89,57.2 89.225,57.425 ; 89.45,57.2 89.225,57.425 ; 94.075,52.925 94.075,52.3 89.225,52.3 89.225,57.425 ; 62.5,68.725 62.5,68.725 ; 79.875,57.2 80.225,57.55 ; 79.875,57.2 79.875,57.2
Mechanical 1:
  lines w0.05: 4.75,53.875 47.375,53.875 47.625,53.625 47.625,49.775 47.375,49.525 43.775,49.525 43.175,50.125 36.4,50.125 36.15,50.375 36.15,52.125 35.9,52.375 23.325,52.375 ; 12.55,40.5 24.6,40.5 24.85,40.25 ; 28.25,35.525 29.925,37.2 32.1,37.2 32.35,36.95 32.35,35.575 32.6,35.325 33.5,35.325 33.75,35.075 33.75,34.6 34,34.35 35,34.35 35.25,34.6 35.25,36.95 35.5,37.2 51.95,37.2 53.4,35.75 ; 84.625,38.3 83.375,39.55 83.375,47.375 83.625,47.625 86.175,47.625 86.425,47.375 86.425,39.3 86.675,39.05 ; 89.125,39.55 93.275,39.55 ; 89.125,39.55 88.875,39.8 88.875,41.8 89.7,42.625 ; 36.15,45.85 36.15,49.125 36.4,49.375 42.925,49.375 43.175,49.125 43.175,46.175 42.625,45.625 41.825,44.825 41.825,42.125 41.575,41.875 39.575,41.875 39.325,42.125 39.325,44.8 38.525,45.6 36.4,45.6 36.15,45.85 ; 43.525,45.6 44.325,44.8 44.325,42.125 44.575,41.875 46.575,41.875 46.825,42.125 46.825,44.825 47.625,45.625 47.625,48.175 47.375,48.425 43.775,48.425 43.525,48.175 43.525,45.6 ; 65.925,47.15 65.925,49 66.175,49.25 68.95,49.25 69.2,49 69.2,36.15 69.2,34.725 68.95,34.475 66.625,34.475 66.375,34.725 66.375,46.7 65.925,47.15
Mechanical 8:
  lines w0.05: 4.375,42.175 24.6,42.175 24.85,41.925 ; 4.75,53.875 47.375,53.875 47.625,53.625 47.625,51.175 47.375,50.925 21.875,50.925 ; 28.25,35.525 29.925,37.2 51.95,37.2 53.4,35.75 ; 71.125,46 71.375,46.25 ; 85.15,33.85 85.4,34.1 ; 83.2,37.475 83.2,43.725 83.45,43.975 88.125,43.975 88.375,43.725 88.375,37.475 88.125,37.225 83.45,37.225 83.2,37.475

## Dimensions
0,100 to 0,0 on Mechanical 1
0,100 to 130,100 on Mechanical 1
126,4 to 130,0 on Mechanical 1
126,4 to 130,0 on Mechanical 1
126,24.82 to 126.005,94.816 on Mechanical 1
126,24.82 to 130,0 on Mechanical 1
69.998,94.816 to 126.005,94.816 on Mechanical 1
3.997,94.81 to 60.004,94.81 on Mechanical 1
126.005,94.816 to 127.254,100.013 on Mechanical 1
69.998,94.816 to 60.004,94.81 on Mechanical 1
60.004,94.81 to 67.945,100.013 on Mechanical 1